# EAGLE board SchaltplanV2 (EAGLE 7.1.0)
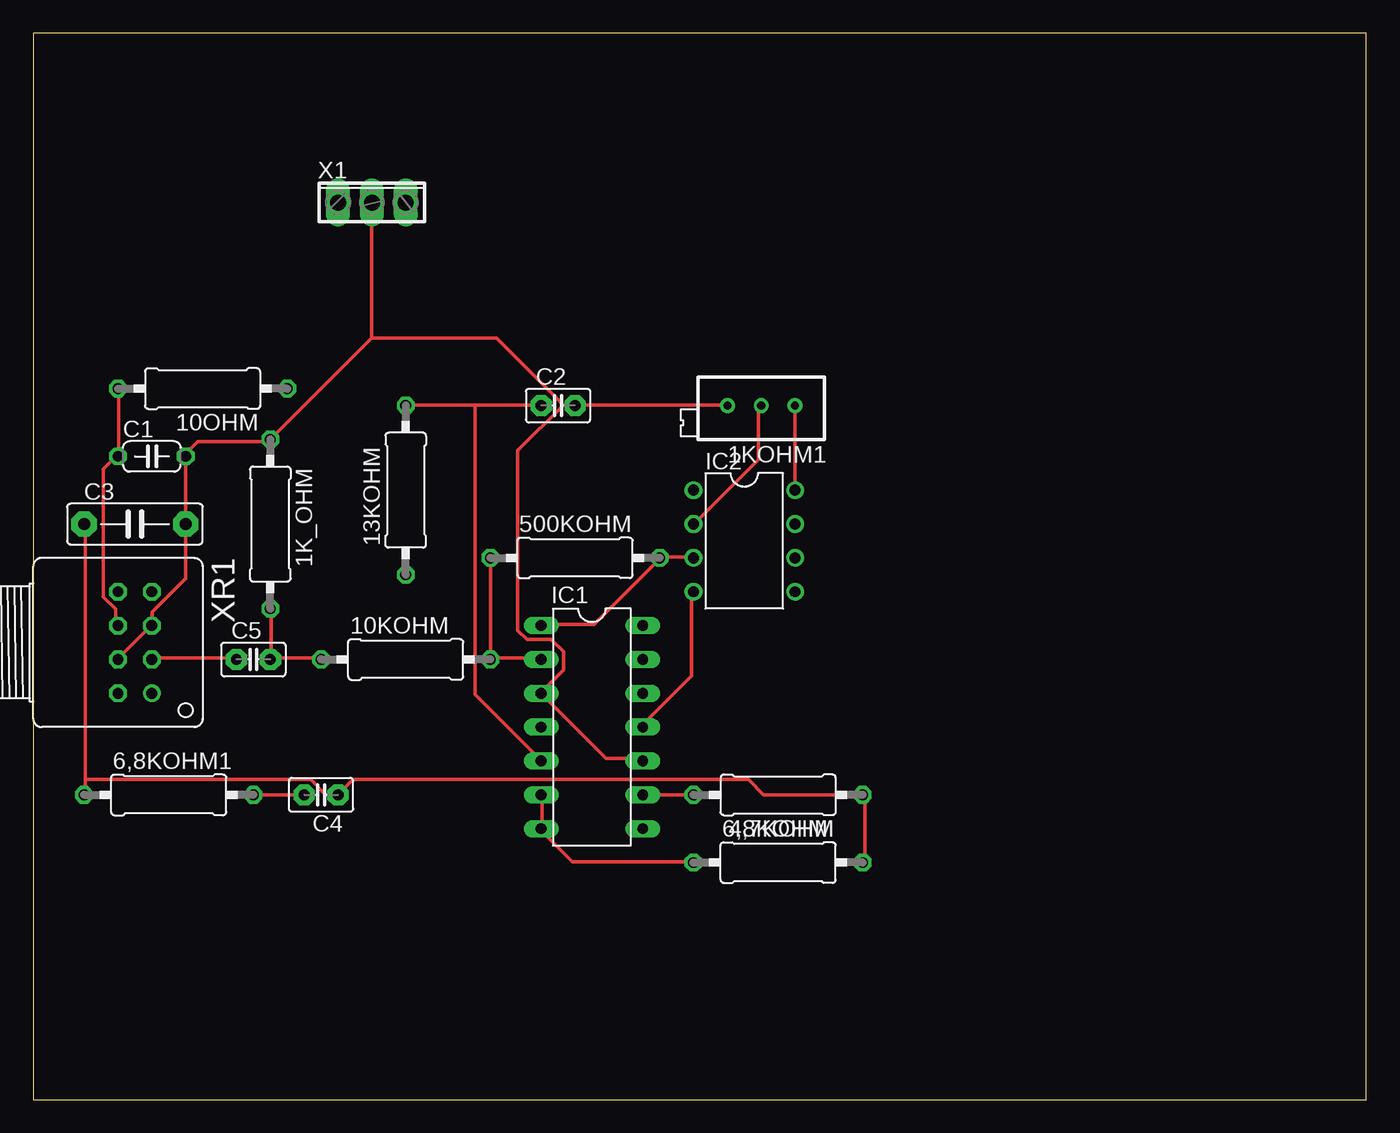
[diagram p0: board, top side]
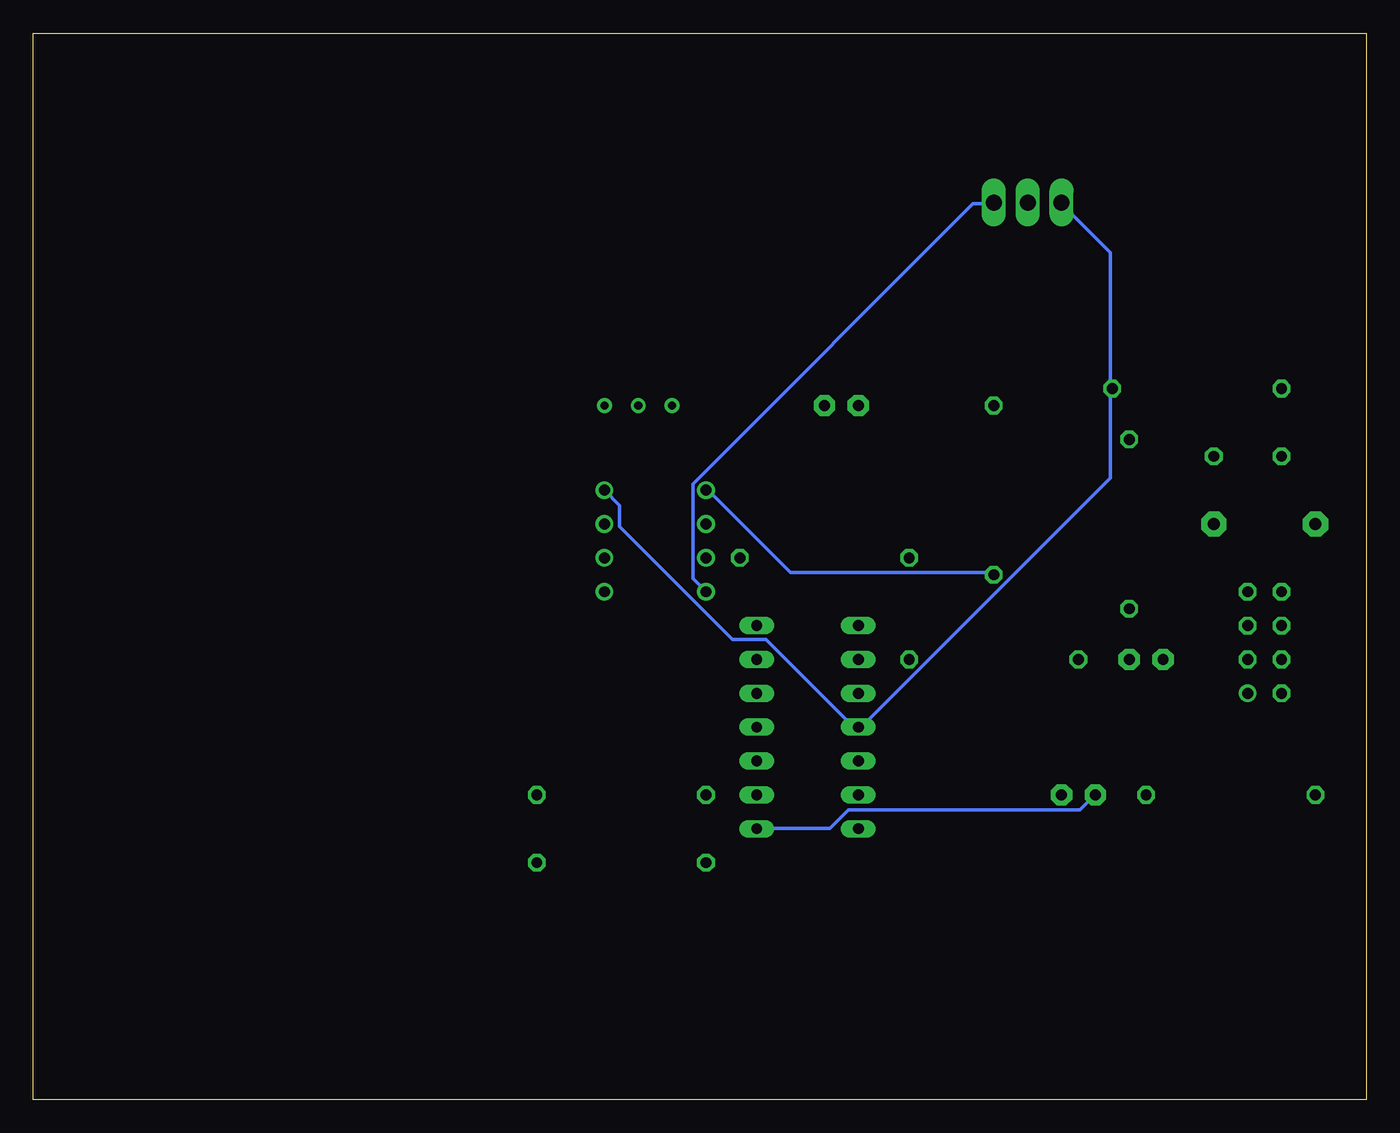
[diagram p1: board, bottom side, seen from below]

Size 100 x 80 mm. Coordinates in mm from the lower left corner, seen from the top.
Outline: 0,0 100,0 100,80 0,80 0,0
Copper layers (1*16): Top 0.035mm / dielectric 1.5mm / Bottom 0.035mm
Design rules "default": minimum track width 10mil, minimum drill 24mil, track to track 8mil, track to pad 8mil, pad to pad 8mil, via to via 8mil, smd to smd 8mil, copper to edge 40mil, drill to drill 8mil, minimum pad ring 10mil, minimum via ring 8mil, stop-mask expansion 4mil, vias tented up to drill 0mil, thermal gap 10mil

## Footprints (pad centres in the part's own frame; a part is rotated, then mirrored left to right if it is on the bottom)
0309/12 = drill 0.813 octagon: 1 -6.35,0; 2 6.35,0
RTRIMT93XA = drill 0.61: 1 0,-2.54; 2 0,0; 3 0,2.54
C050-024X044 = drill 0.813 octagon: 1 -2.54,0; 2 2.54,0
C2.5-2 = drill 0.813 pad 1.6 octagon: 1 -1.27,0; 2 1.27,0
C7.5B3 = drill 0.914 pad 1.905 octagon: 1 -3.81,0; 2 3.81,0
DIL14 = drill 0.813 long: 1 -7.62,-3.81; 2 -5.08,-3.81; 3 -2.54,-3.81; 4 0,-3.81; 5 2.54,-3.81; 6 5.08,-3.81; 7 7.62,-3.81; 8 7.62,3.81; 9 5.08,3.81; 10 2.54,3.81; 11 0,3.81; 12 -2.54,3.81; 13 -5.08,3.81; 14 -7.62,3.81
DIL08 = drill 0.813 pad 1.27: 1 -3.81,-3.81; 2 -1.27,-3.81; 3 1.27,-3.81; 4 3.81,-3.81; 5 3.81,3.81; 6 1.27,3.81; 7 -1.27,3.81; 8 -3.81,3.81
3POL254 = drill 1.2 long: 1 -2.54,0; 2 0,0; 3 2.54,0
HFBR-X41XT = drill 0.813: 1 3.81,2.54 | drill 0.813 octagon: 2 1.27,2.54; 3 -1.27,2.54; 4 -3.81,2.54; 5 -3.81,0; 6 -1.27,0; 7 1.27,0; 8 3.81,0

## Placement (x,y rotation side)
1K_OHM  1000  [0309/12]  17.78,43.18 270 top
1KOHM1  1000  [RTRIMT93XA]  54.61,52.07 90 top
4,7KOHM  4700  [0309/12]  55.88,22.86 180 top
6,8KOHM  6800  [0309/12]  55.88,17.78 0 top
6,8KOHM1  6800  [0309/12]  10.16,22.86 0 top
10KOHM  10000  [0309/12]  27.94,33.02 0 top
10OHM  10  [0309/12]  12.7,53.34 180 top
13KOHM  13000  [0309/12]  27.94,45.72 90 top
500KOHM  500000  [0309/12]  40.64,40.64 0 top
C1  22pF  [C050-024X044]  8.89,48.26 0 top
C2  100nF  [C2.5-2]  39.37,52.07 0 top
C3  1µF  [C7.5B3]  7.62,43.18 0 top
C4  100nF  [C2.5-2]  21.59,22.86 180 top
C5  100nF  [C2.5-2]  16.51,33.02 0 top
IC1  LM324N  [DIL14]  41.91,27.94 270 top
IC2  LM393N  [DIL08]  53.34,41.91 270 top
X1  +5V,0V,-5V  [3POL254]  25.4,67.31 0 top
XR1  HFBR-2412T  [HFBR-X41XT]  6.35,34.29 270 top

## Library data of the parts
1K_OHM 4,7KOHM 6,8KOHM 6,8KOHM1 10KOHM 10OHM 13KOHM 500KOHM = resistor; SPICEPREFIX: R
1KOHM1 = resistor
C1 = rcl
C2-C5 = capacitor-wima
IC1 IC2 = linear
X1 = con-phoenix-254; OC_FARNELL: unknown; OC_NEWARK: unknown
XR1 = RecieverDiode; MF: AGILENT TECHNOLOGIES; MPN: HFBR-2412T; OC_FARNELL: 1247650; OC_NEWARK: 06F6075

## Nets
GND: 1K_OHM.1 1KOHM1.3 C1.2 C2.2 C3.2 IC1.3 IC1.10 X1.2 XR1.3 XR1.7
N$1: 4,7KOHM.1 6,8KOHM1.1 6,8KOHM.2 C3.1 C4.1
N$2: 4,7KOHM.2 IC1.9
N$3: C5.1 XR1.2
N$4: 10OHM.2 C1.1 XR1.6
N$5: 1K_OHM.2 10KOHM.1 C5.2
N$6: 500KOHM.2 IC1.1 IC2.3
N$7: 1KOHM1.2 IC2.2
N$8: 13KOHM.1 IC2.1
N$9: 10KOHM.2 500KOHM.1 IC1.2
N$10: 13KOHM.2 C2.1 IC1.5
N$11: 6,8KOHM.1 IC1.6 IC1.7
N$13: 6,8KOHM1.2 C4.2 IC1.8
V+: 1KOHM1.1 10OHM.1 IC1.4 IC2.8 X1.1
V-: IC1.11 IC2.4 X1.3

## Tracks (layer width: path | path; a pad name or v marks a point on that pad's centre or on a via)
GND
  Top 0.254: IC1.10 45.72,25.6 42.98,25.6 IC1.3 38.18,30.63 39.78,32.23 39.78,33.6 38.86,34.52 37.03,34.52 36.35,35.2 36.35,48.69 39.78,52.12 | 1KOHM1.3 51.89,52.12 40.69,52.12 C2.2 40.46,52.12 39.78,52.12 | XR1.7 6.4,33.15 8.69,35.43 XR1.3 8.91,35.66 8.91,36.58 11.43,39.09 C3.2 C1.2 11.43,48.46 12.34,49.38 17.6,49.38 1K_OHM.1 17.83,49.61 25.38,57.15 | 25.38,57.15 25.38,67.21 X1.2 | 39.78,52.12 34.75,57.15 25.38,57.15
N$1
  Top 0.254: 6,8KOHM.2 62.41,17.83 62.41,22.86 4,7KOHM.1 54.79,22.86 53.65,24 24,24 C4.1 21.95,22.86 20.8,24 3.89,24 | 3.89,24 3.89,42.98 C3.1 | 3.89,24 3.89,22.86 6,8KOHM1.1
N$2
  Top 0.254: 4,7KOHM.2 IC1.9
N$3
  Top 0.254: XR1.2 8.91,33.15 15.09,33.15 C5.1
N$4
  Top 0.254: XR1.6 6.17,35.66 6.17,36.8 5.26,37.72 5.26,47.32 6.17,48.23 C1.1 6.4,48.46 6.4,53.26 10OHM.2
N$5
  Top 0.254: 17.83,33.15 21.49,33.15 10KOHM.1 | 17.83,33.15 17.83,36.8 1K_OHM.2 | 17.83,33.15 C5.2
N$6
  Top 0.254: IC1.1 38.18,35.66 42.06,35.66 46.86,40.46 500KOHM.2 47.09,40.69 49.38,40.69 IC2.3
N$7
  Top 0.254: 1KOHM1.2 54.41,51.89 54.41,48.01 49.61,43.2 IC2.2
N$8
  Bottom 0.254: 13KOHM.1 28.12,39.55 43.2,39.55 49.38,45.72 IC2.1
N$9
  Top 0.254: 34.29,33.15 37.95,33.15 IC1.2 | 34.29,33.15 500KOHM.1 | 34.29,33.15 10KOHM.2
N$10
  Top 0.254: 33.15,52.12 37.95,52.12 C2.1 | 33.15,52.12 28.12,52.12 13KOHM.2 | 33.15,52.12 33.15,30.4 37.95,25.6 IC1.5
N$11
  Top 0.254: IC1.6 38.18,22.86 38.18,20.34 IC1.7 38.18,20.12 40.46,17.83 49.38,17.83 6,8KOHM.1
N$13
  Top 0.254: C4.2 6,8KOHM1.2
  Bottom 0.254: IC1.8 45.72,20.34 40.23,20.34 38.86,21.72 21.49,21.72 20.34,22.86 C4.2
V+
  Top 0.254: IC2.8 1KOHM1.1
  Bottom 0.254: X1.1 22.86,67.21 19.2,63.55 19.2,53.49 10OHM.1 19.2,53.26 19.2,46.63 37.95,27.89 IC1.4 38.18,28.12 38.63,28.12 45.03,34.52 47.55,34.52 56.01,42.98 56.01,44.58 IC2.8
V-
  Top 0.254: IC1.11 45.72,28.12 49.38,31.77 49.38,37.95 IC2.4
  Bottom 0.254: IC2.4 50.52,39.09 50.52,46.18 29.49,67.21 28.12,67.21 X1.3